# EAGLE board LID_Panel (EAGLE 9.6.2)

No outline drawn. Coordinates in mm, seen from the top.
Copper layers (1*16): Top 0.035mm / dielectric 0.15mm / Bottom 0.035mm
Design rules "default": minimum track width 6mil, minimum drill 0.35mm, track to track 6mil, track to pad 6mil, pad to pad 6mil, via to via 6mil, smd to smd 6mil, copper to edge 40mil, drill to drill 6mil, minimum pad ring 10mil, minimum via ring 8mil, stop-mask expansion 4mil, vias tented up to drill 0mil, thermal gap 10mil

## Placement (x,y rotation side)
E$1  [LID]  3.81,298.45 270 top
E$2  [LID]  3.81,229.87 270 top
E$3  [LID]  3.81,161.29 270 top
E$4  [LID]  3.81,92.71 270 top
E$5  [LID]  93.98,298.45 270 top
E$6  [LID]  93.98,229.87 270 top
E$7  [LID]  93.98,161.29 270 top
E$8  [LID]  93.98,92.71 270 top
E$9  [LID]  184.15,298.45 270 top
E$10  [LID]  184.15,229.87 270 top
E$11  [LID]  184.15,161.29 270 top
E$12  [LID]  184.15,92.71 270 top
E$13  [LID]  274.32,298.45 270 top
E$14  [LID]  274.32,229.87 270 top
E$15  [LID]  274.32,161.29 270 top
E$16  [LID]  274.32,92.71 270 top
E$17  [LID]  364.49,298.45 270 top
E$18  [LID]  364.49,229.87 270 top
E$19  [LID]  364.49,161.29 270 top
E$20  [LID]  364.49,92.71 270 top
E$21  [LID]  454.66,298.45 270 top
E$22  [LID]  454.66,229.87 270 top
E$23  [LID]  454.66,161.29 270 top
E$24  [LID]  454.66,92.71 270 top

## Library data of the parts
E$1-E$24 = snake